# EAGLE board ASDF (EAGLE 9.4.0)
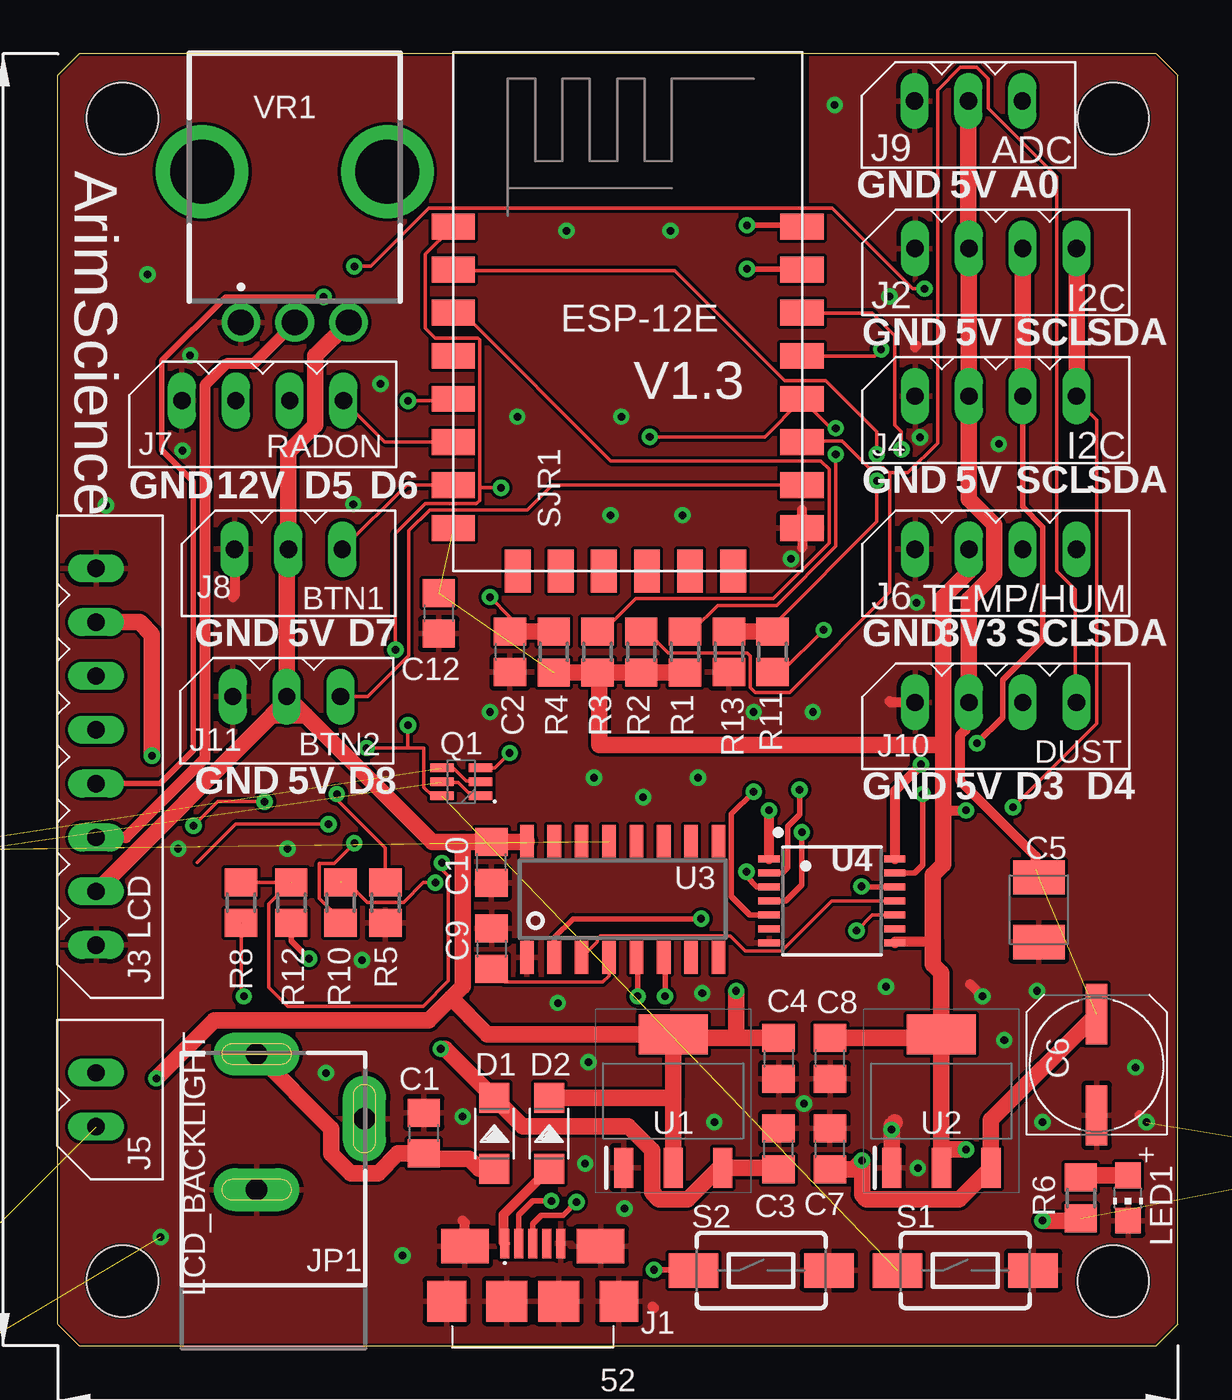
[diagram p0: board, top side]
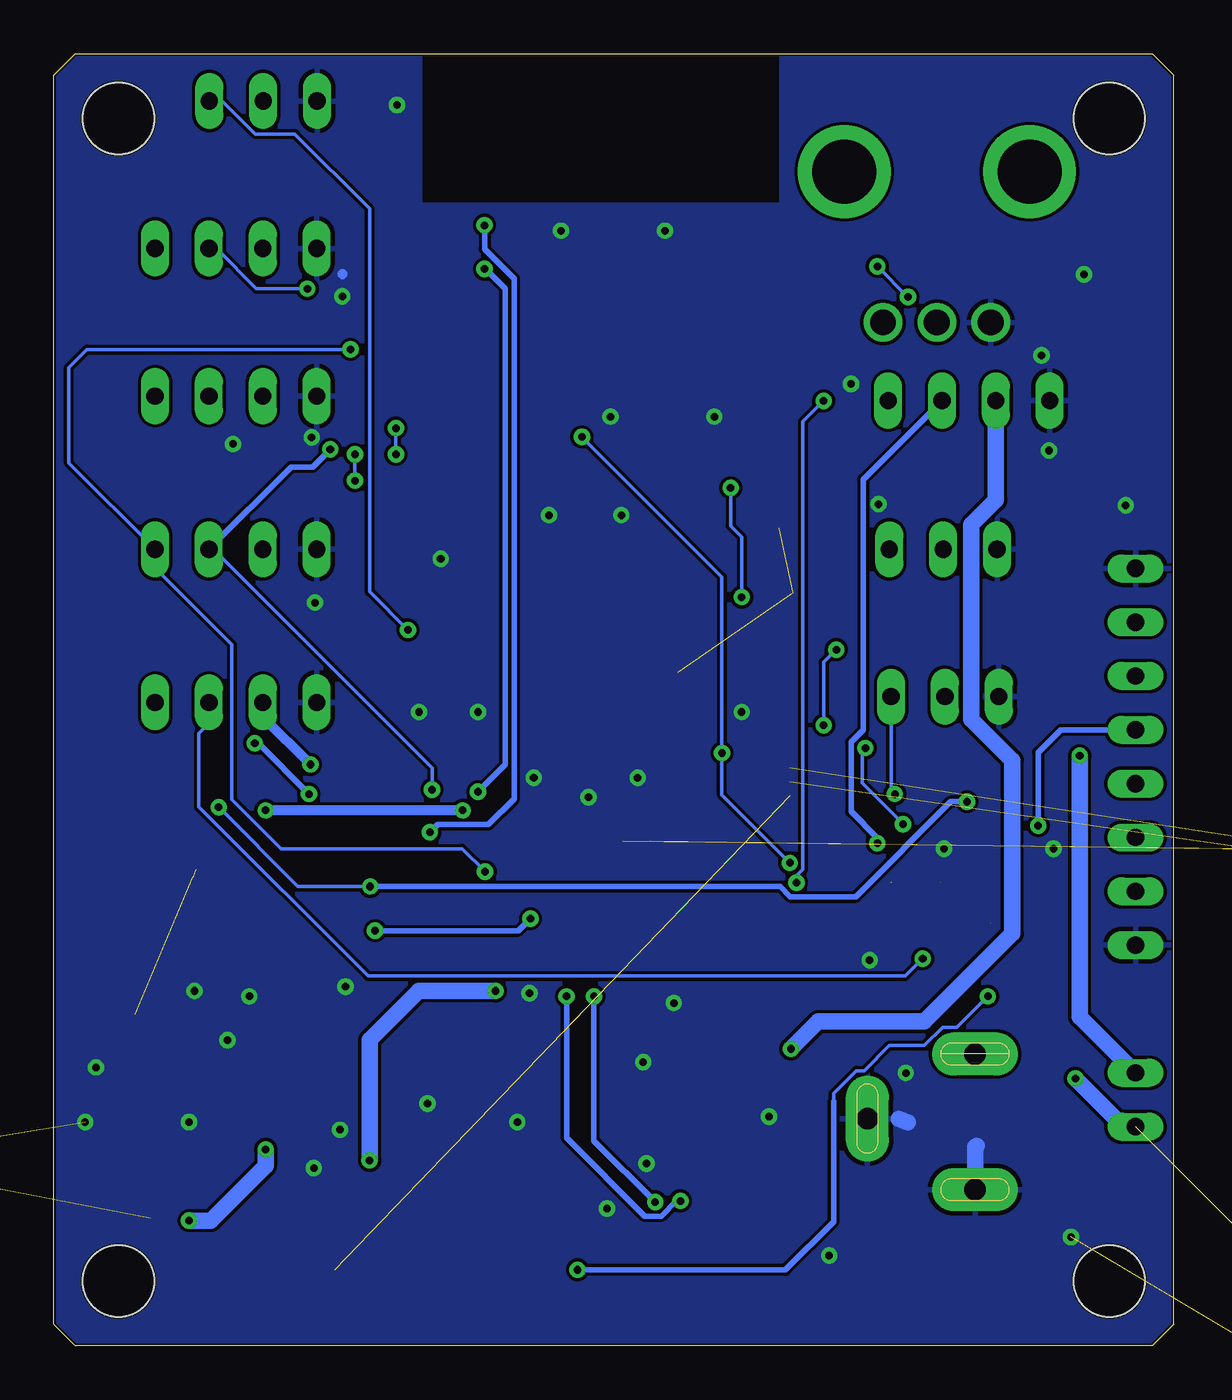
[diagram p1: board, bottom side, seen from below]

Size 52 x 60 mm. Coordinates in mm from the lower left corner, seen from the top.
Outline: 0,1 0,59 1,60 51,60 52,59 52,1 51,0 1,0 0,1
Copper layers (1*16): Top 0.035mm / dielectric 1.5mm / Bottom 0.035mm
Design rules "default *": minimum track width 6mil, minimum drill 0.35mm, track to track 6mil, track to pad 6mil, pad to pad 6mil, via to via 6mil, smd to smd 6mil, copper to edge 4mil, drill to drill 6mil, minimum pad ring 10mil, minimum via ring 8mil, stop-mask expansion 4mil, vias tented up to drill 15mil, thermal gap 8mil
Net classes: 1 power: width 0.457 mm
Holes 3.3 mm at 3,57 49,57 49,3 3,3

## Footprints (pad centres in the part's own frame; a part is rotated, then mirrored left to right if it is on the bottom)
C0805 = smd 1.3 x 1.5: 1 -0.95,0; 2 0.95,0
SMC_B = smd 1.6 x 2.4: + -1.5,0; - 1.5,0
UD-6,3X7,7_NICHICON = smd 2.8 x 1: + 2.35,0; - -2.35,0
SOD-123 = smd 1.397 x 1.397: + -1.651,0; - 1.651,0
ZX62B5PA33 = smd 0.4 x 1.35: D+ 0,1.95; D- -0.65,1.95; GND 1.3,1.95; ID 0.65,1.95; VCC -1.3,1.95 | smd 2.2 x 1.6: SHIELD_1 -3.15,1.825; SHIELD_6 3.15,1.825 | smd 1.8 x 1.9: SHIELD_2 -4,-0.725; SHIELD_5 4,-0.725 | smd 1.9 x 1.9: SHIELD_3 -1.2,-0.725; SHIELD_4 1.2,-0.725
5267-4 = drill 0.8 long: P$1 0,0; P$2 2.5,0; P$3 5,0; P$4 7.5,0
5267-8 = drill 0.8 long: P$1 0,0; P$2 2.5,0; P$3 5,0; P$4 7.5,0; P$5 10,0; P$6 12.5,0; P$7 15,0; P$8 17.5,0
5267-2 = drill 0.8 long: P$1 0,0; P$2 2.5,0
5267-3 = drill 0.8 long: P$1 0,0; P$2 2.5,0; P$3 5,0
POWER_JACK_SLOT = drill 1 pad 2 long: GND@1 2.5,1.39; GND@2 -2.5,-1.91; PWR 2.5,-4.91
CHIP-LED0805 = smd 1.2 x 1.2: A 0,-1.05; C 0,1.05
SOT65P210X100-6N = smd 1.1 x 0.4: 1 -0.9,0.65; 2 -0.9,0; 3 -0.9,-0.65; 4 0.9,-0.65; 5 0.9,0; 6 0.9,0.65
R0805 = smd 1.3 x 1.5: 1 -0.95,0; 2 0.95,0
TACTILE_SWITCH_SMD_6.0X3.5MM = smd 2.3 x 1.6: 1 -3.15,0; 2 3.15,0
ESP8266-ESP12E = smd 2 x 1.2: 1 -7.62,5.84; 2 -7.62,3.84; 3 -7.62,1.84; 4 -7.62,-0.16; 5 -7.62,-2.16; 6 -7.62,-4.16; 7 -7.62,-6.16; 8 -7.62,-8.16; 9 8.58,-8.16; 10 8.58,-6.16; 11 8.58,-4.16; 12 8.58,-2.16; 13 8.58,-0.16; 14 8.58,1.84; 15 8.58,3.84; 16 8.58,5.84 | smd 1.2 x 2: 17 -4.62,-10.16; 18 -2.62,-10.16; 19 -0.62,-10.16; 20 1.38,-10.16; 21 3.38,-10.16; 22 5.38,-10.16
SOT230P700X170-4N = smd 1.85 x 0.9: 1 -3.1,2.3; 2 -3.1,0; 3 -3.1,-2.3 | smd 1.85 x 3.2: 4 3.1,0
SOIC16 = smd 0.635 x 1.524: 1 -4.445,-2.695; 2 -3.175,-2.695; 3 -1.905,-2.695; 4 -0.635,-2.695; 5 0.635,-2.695; 6 1.905,-2.695; 7 3.175,-2.695; 8 4.445,-2.695; 9 4.445,2.695; 10 3.175,2.695; 11 1.905,2.695; 12 0.635,2.695; 13 -0.635,2.695; 14 -1.905,2.695; 15 -3.175,2.695; 16 -4.445,2.695
TSSOP14 = smd 0.305 x 0.991: 1 -1.95,-2.918; 2 -1.3,-2.918; 3 -0.65,-2.918; 4 0,-2.918; 5 0.65,-2.918; 6 1.3,-2.918; 7 1.95,-2.918; 8 1.95,2.918; 9 1.3,2.918; 10 0.65,2.918; 11 0,2.918; 12 -0.65,2.918; 13 -1.3,2.918; 14 -1.95,2.918
RK09K1130BGM = drill 1.2 pad 1.8: 1 -2.5,-12.5; 2 0,-12.5; 3 2.5,-12.5 | drill 2.97 pad 4.3: 4 4.3,-5.5; 5 -4.3,-5.5

## Placement (x,y rotation side)
C1  10uF  [C0805]  16.99,9.87 270 top
C2  100nF  [C0805]  20.99,32.23 90 top
C3  10uF  [C0805]  33.46,9.14 90 top
C4  22uF  [C0805]  33.47,13.35 270 top
C5  100uF  [SMC_B]  45.55,20.25 270 top
C6  220uF  [UD-6,3X7,7_NICHICON]  48.23,13.05 90 top
C7  10uF  [C0805]  35.85,9.14 90 top
C8  22uF  [C0805]  35.86,13.35 90 top
C9  100nF  [C0805]  20.14,18.44 270 top
C10  100nF  [C0805]  20.13,22.45 90 top
C11  100uF  [SMC_B]  75.63,17.43 270 top  (outside the outline)
C12  100nF  [C0805]  17.69,34.02 90 top
C13  220uF  [UD-6,3X7,7_NICHICON]  74.52,8.76 90 top  (outside the outline)
C14  100nF  [C0805]  -19.05,-9.68 0 top  (outside the outline)
D1  1N5819W  [SOD-123]  20.27,9.86 90 top
D2  1N5819W  [SOD-123]  22.81,9.86 90 top
J1  ZX62-B-5PA(33)  [ZX62B5PA33]  22.05,2.79 0 top
J2  I2C  [5267-4]  39.8,50.96 0 top
J3  LCD  [5267-8]  1.78,18.6 90 top
J4  I2C  [5267-4]  39.8,44.1 0 top
J5  LCD_BACKLIGHT  [5267-2]  1.78,10.17 90 top
J6  TEMP/HUM  [5267-4]  39.8,36.99 0 top
J7  RADON  [5267-4]  5.76,43.9 0 top
J8  BTN1  [5267-3]  8.21,36.99 0 top
J9  ADC  [5267-3]  39.78,57.81 0 top
J10  DUST  [5267-4]  39.8,29.88 0 top
J11  BTN2  [5267-3]  8.13,30.15 0 top
JP1  POWER_JACKSLT  [POWER_JACK_SLOT]  11.73,8.64 180 top
LED1  green  [CHIP-LED0805]  49.69,6.86 180 top
Q1  UMH3N  [SOT65P210X100-6N]  18.73,26.19 180 top
R1  10k  [R0805]  29.12,32.23 90 top
R2  10k  [R0805]  27.09,32.23 90 top
R3  10k  [R0805]  25.06,32.23 90 top
R4  10k  [R0805]  23.02,32.23 90 top
R5  10k  [R0805]  15.21,20.57 90 top
R6  10k  [R0805]  47.5,6.86 90 top
R8  470Ω  [R0805]  8.51,20.57 270 top
R9  10k  [R0805]  -20.27,21.91 90 top  (outside the outline)
R10  470Ω  [R0805]  13.13,20.57 270 top
R11  47k(1%)  [R0805]  33.19,32.23 270 top
R12  470Ω  [R0805]  10.84,20.57 270 top
R13  10k(1%)  [R0805]  31.16,32.23 90 top
R14  10k  [R0805]  -18.19,21.91 90 top  (outside the outline)
S1  RST  [TACTILE_SWITCH_SMD_6.0X3.5MM]  42.13,3.49 0 top
S2  FLASH  [TACTILE_SWITCH_SMD_6.0X3.5MM]  32.65,3.49 0 top
SJR1  ESP-12E  [ESP8266-ESP12E]  25.97,46.13 0 top
U1  5V_REG  [SOT230P700X170-4N]  28.57,11.37 90 top
U2  3V3_REG  [SOT230P700X170-4N]  41.02,11.37 90 top
U3  CH340C  [SOIC16]  26.23,20.73 0 top
U4  TXB0104  [TSSOP14]  35.94,20.66 270 top
VR1  RK09K1130AAU  [RK09K1130BGM]  11,60.02 0 top

## Library data of the parts
C1-C14 = rcl; SPICEPREFIX: C
D1 D2 = Seeed-Diode; MPN: SS0520-7-F
J1 = SamacSys_Parts; DESCRIPTION: USB Connectors MICRO B RECEPT RA SMT BTTM MNT; HEIGHT: 2.8mm; MANUFACTURER_NAME: Hirose; MANUFACTURER_PART_NUMBER: ZX62-B-5PA(33); MOUSER_PART_NUMBER: 798-ZX62-B-5PA33; MOUSER_PRICE-STOCK: https://www.mouser.com/Search/Refine.aspx?Keyword=798-ZX62-B-5PA33
J2-J11 = con-molex-spox
JP1 = kanflo
LED1 = adafruit
Q1 = SamacSys_Parts; DESCRIPTION: ROHM - UMH3NFHATN - TRANS, NPN, AUTO, 4.7K/4.7K, SOT-353; HEIGHT: 1mm; MANUFACTURER_NAME: ROHM Semiconductor; MANUFACTURER_PART_NUMBER: UMH3NFHATN; MOUSER_PART_NUMBER: 755-UMH3NFHATN; MOUSER_PRICE-STOCK: https://www.mouser.com/Search/Refine.aspx?Keyword=755-UMH3NFHATN
R1-R6 R8-R14 = rcl; SPICEPREFIX: R
S1 S2 = SparkFun-Switches; PROD_ID: SWCH-00815; SF_SKU: COM-08229
SJR1 = esp12e
U1 U2 = SamacSys_Parts; DESCRIPTION: 1A 5V LDO Linear Voltage Reg SOT-223 Diodes Inc AZ1117H-5.0TRE1, Single Linear Voltage Regulator, 1A 4.9 5.1 V, 1%, 3-Pin SOT-223; HEIGHT: 1.7mm; MANUFACTURER_NAME: Diodes Inc.; MANUFACTURER_PART_NUMBER: AZ1117H-5.0TRE1; MOUSER_PART_NUMBER: 621-AZ1117H-5.0TRE1; MOUSER_PRICE-STOCK: https://www.mouser.com/Search/Refine.aspx?Keyword=621-AZ1117H-5.0TRE1
U3 = ch340g
U4 = SparkFun-IC-Comms; PROD_ID: NA-XXXXX
VR1 = SamacSys_Parts; DESCRIPTION: Audio single pot. 10K Vertical 15mm,1B Alps RK09K Series, Linear Potentiometer with a 6 mm Dia. Shaft, 10k, +/-20%, Through Hole; HEIGHT: mm; MANUFACTURER_NAME: ALPS; MANUFACTURER_PART_NUMBER: RK09K1130A6S; MOUSER_PART_NUMBER: 688-RK09K1130A6S; MOUSER_PRICE-STOCK: https://www.mouser.com/Search/Refine.aspx?Keyword=688-RK09K1130A6S

## Nets
3.3V [power]: C8.2 C11.+ C12.2 C13.+ J6.P$2 R1.1 R2.1 R3.1 R4.1 R6.1 SJR1.8 U2.2 U2.4 U4.1 U4.8
5V [power]: C4.1 C5.+ C6.+ C7.1 C10.2 C14.2 D2.- J2.P$2 J3.P$2 J4.P$2 J5.P$1 J8.P$2 J9.P$2 J10.P$2 J11.P$2 U1.2 U1.4 U2.3 U3.16 U4.14 VR1.3
5V_INPUT [power]: D2.+ J1.VCC
12V [power]: C3.1 D1.- J7.P$2 U1.3
ADC: R11.1 R13.2 SJR1.2
CS0_ESP: SJR1.17
D+_USB: J1.D+ U3.5
D-_USB: J1.D- U3.6
DTR: Q1.2 Q1.4 R9.1
EN: R3.2 SJR1.3
GND [power]: C1.1 C2.1 C3.2 C4.2 C5.- C6.- C7.2 C8.1 C9.1 C10.1 C11.- C12.1 C13.- C14.1 J1.GND J1.SHIELD_1 J1.SHIELD_2 J1.SHIELD_3 J1.SHIELD_4 J1.SHIELD_5 J1.SHIELD_6 J2.P$1 J3.P$1 J3.P$8 J4.P$1 J6.P$1 J7.P$1 J8.P$1 J9.P$1 J10.P$1 J11.P$1 JP1.GND@1 JP1.GND@2 LED1.C R5.1 R13.1 S1.2 S2.2 SJR1.9 U1.1 U2.1 U3.1 U4.7 VR1.1
GPIO0: Q1.3 R1.2 R8.1 R12.1 SJR1.12
GPIO2: J10.P$4 R2.2 SJR1.11
GPIO4: J6.P$4 SJR1.13 U4.3
GPIO5: J6.P$3 SJR1.14 U4.2
GPIO9: SJR1.19
GPIO10: SJR1.20
GPIO12: J7.P$4 SJR1.6
GPIO13: J8.P$3 SJR1.7
GPIO14: R10.1 SJR1.5
GPIO15: J11.P$3 R5.2 SJR1.10
GPIO16: SJR1.4
LED+: J3.P$7 J5.P$2
MISO_ESP: SJR1.18
MOSI_ESP: SJR1.21
N$1: C9.2 U3.4
N$2: J3.P$3 VR1.2
N$3: C1.2 D1.+ JP1.PWR
N$4: LED1.A R6.2
N$5: J9.P$3 R11.2
N$6: J7.P$3 R10.2
N$7: R9.2 U3.13
N$8: R14.2 U3.14
N$9: J10.P$3 R12.2
POWER1: R8.2 S2.1
RST: C2.2 Q1.6 R4.2 S1.1 SJR1.1
RTS: Q1.1 Q1.5 R14.1
RXD: SJR1.15 U4.5
RXD_5V: U3.2 U4.10
SCL_5V: J2.P$3 J3.P$4 J4.P$3 U4.13
SCLK_ESP: SJR1.22
SDA_5V: J2.P$4 J3.P$5 J4.P$4 U4.12
TXD: SJR1.16 U4.4
TXD_5V: U3.3 U4.11

## Tracks (layer width: path | path; a pad name or v marks a point on that pad's centre or on a via)
3.3V  (via drill 0.35)  (4 unrouted)
  Top 0.457: U4.1 v33.02,24.86 | 41.11,24.86 v42.16,24.86 | 40.62,18.76 38.86,18.76 U4.8
  Top 0.762: C8.2 40.85,14.3 U2.4 | U2.4 41.02,9.11 | 41.02,9.11 U2.2 | R3.1 R2.1 R1.1 | U2.4 41.02,17.31 40.62,17.7 40.62,18.76 40.62,21.87 41.11,22.36 41.11,24.86 41.11,27.91 | J6.P$2 42.3,35.95 41.11,34.76 41.11,27.91 | R4.1 R3.1 | R3.1 25.15,31.19 25.15,27.91 41.11,27.91 | v45.72,5.81 47.4,5.81 R6.1 | v42.16,9.11 41.02,9.11
  Bottom 0.457: v33.02,24.86 v42.16,24.86
  Bottom 0.762: v42.16,9.11 42.16,8.35 44.7,5.81 v45.72,5.81
5V  (via drill 0.35)  (3 unrouted)
  Top 0.457: v40.08,26.99 38.86,25.77 38.86,22.65 U4.14 | 45.41,22.12 45.41,22.73 41.91,26.23 41.91,28.36 42.14,28.59 42.14,29.51 J10.P$2
  Top 0.762: J10.P$2 42.3,34.66 43.49,35.84 43.49,38.14 42.3,39.32 J4.P$2 J2.P$2 42.28,50.98 J9.P$2 | J11.P$2 10.63,36.91 J8.P$2 10.71,41.51 11.95,42.75 11.95,45.98 VR1.3 | C4.1 31.24,14.3 | 31.24,14.3 28.74,14.3 U1.4 | U1.4 28.57,11.51 | D2.- 28.57,11.51 | J3.P$2 9.94,29.26 | 9.94,29.26 10.63,29.95 J11.P$2 | U3.16 21.75,23.4 C10.2 18.8,23.4 | J11.P$2 11.51,29.26 | 11.51,29.26 17.38,23.4 18.8,23.4 | 11.51,29.26 9.94,29.26 | v31.5,16.48 31.5,14.55 31.24,14.3 | 18.8,23.4 18.8,16.68 18.27,16.14 | v4.57,12.41 7.26,15.11 17.23,15.11 18.27,16.14 | 18.27,16.14 19.94,14.47 U1.4 | U1.2 28.57,11.51 | C7.1 36.93,8.19 v37.34,8.6 37.34,7.01 37.54,6.81 41.86,6.81 U2.3 43.32,10.49 C6.+
  Bottom 0.457: v40.08,26.99 42.29,29.2 42.29,29.81 J10.P$2
  Bottom 0.762: v31.5,16.48 35.05,16.48 37.34,14.19 v37.34,8.6 | v4.57,12.41 2.33,10.17 J5.P$1
5V_INPUT
  Top 0.457: J1.VCC 20.7,4.79 20.7,6.1 D2.+
12V  (via drill 0.35)
  Top 0.762: C3.1 33.39,8.27 U1.3 30.7,8.27 29.25,6.81 27.9,6.81 27.59,7.12 27.59,9.08 26.49,10.18 21.59,10.18 D1.- 17.99,13.79 v17.78,13.79
  Bottom 0.762: v17.78,13.79 16.51,15.06 11.58,15.06 7.5,19.14 7.5,27.19 9.39,29.08 9.39,38.14 8.26,39.27 J7.P$2
ADC  (via drill 0.35)
  Top 0.152: v38.02,41.4 38.02,42.46 35.66,44.82 33.76,44.82 28.65,49.93 18.36,49.93 SJR1.2 | v38.02,40.18 38.02,38.27 33.3,33.55 R11.1
  Top 0.762: R11.1 R13.2
  Bottom 0.152: v38.02,40.18 v38.02,41.4
D+_USB  (via drill 0.35)
  Top 0.254: v26.92,16.22 26.92,17.98 U3.5 | v24.08,6.67 23.47,6.06 22.45,6.06 22.05,5.67 J1.D+
  Bottom 0.254: v24.08,6.67 26.92,9.52 v26.92,16.22
D-_USB  (via drill 0.35)
  Top 0.254: v28.19,16.22 28.19,17.98 U3.6 | v22.91,6.72 22.05,6.72 21.4,6.08 J1.D-
  Bottom 0.254: v28.19,16.22 28.19,9.66 24.55,6.02 23.81,6.02 23.1,6.72 v22.91,6.72
DTR  (1 unrouted)
  Top 0.152: Q1.4 17.91,26.84 18.36,26.84 18.97,26.23 19.58,26.23 Q1.2 19.66,26.16
EN
  Top 0.152: R3.2 25.07,33.24 25.38,33.24 26.82,34.69 33.22,34.69 35.81,37.28 35.81,40.71 35.43,41.09 25.68,41.09 18.82,47.95 18.36,47.95 SJR1.3
GND  (via drill 0.35)  (3 unrouted)
  Top 0.457: 45.55,16.56 v45.47,16.48 | 42.36,16.79 v42.93,16.22 | 50.23,10.7 v50.55,10.38 | 35.85,12.39 C8.1 | C3.2 | J10.P$1 38.67,29.88 38.61,29.94 | J1.SHIELD_2 17.98,2 | 27.62,1.81 27.69,1.75 | J1.SHIELD_1 18.9,5.7 18.8,5.81 | 39.8,46.37 39.88,46.45 | J8.P$1 8.21,34.85 8.13,34.77 | 34.55,38.83 SJR1.9 34.55,37.05
  Top 0.762: C12.1 17.7,33.05 | U2.1 38.72,10.24 38.86,10.38
  Bottom 0.457: 38.61,49.77 38.61,49.75
  Bottom 0.762: JP1.GND@1 9.23,9.23 9.14,9.28 | 12.77,10.55 12.36,10.38
  other vias: 16,4.18 23.62,51.78 28.45,51.78 21.34,43.15 26.16,43.15 27.18,25.47 29.92,16.38 5.59,23.08 10.67,23.08 4.78,5.05 14.99,44.67 13.72,39.08 45.72,10.38 24.64,13.18 30.48,10.38 26.31,6.37 34.04,36.54 39.88,34.51 5.79,41.57 32.31,29.43 35.05,29.43 20.07,29.43 24.89,26.38 29.72,26.38 18.8,10.64 14.12,17.9 2.24,39.03 4.17,49.75 36.07,57.63 43.69,41.88 50.04,12.92 43.94,14.19 38.71,10.03 39.93,8.25 29.01,38.58 25.65,38.58 12.45,12.67 38.61,48.74 40.03,42.18 6.15,45.99 23.22,15.92 24.49,8.45 34.65,11.25 38.46,16.68
  pour Top: -6.89,65.66 -6.89,-6.35 70.47,-6.35 70.47,65.66
  pour Bottom: -8.89,65.66 -8.89,-4.35 71.47,-4.35 71.47,65.66
GPIO0  (via drill 0.35)  (1 unrouted)
  Top 0.152: v20.98,27.53 20.3,26.84 19.66,26.84 Q1.3 | v17.83,22.42 17.83,22.12 18.14,21.81 18.14,16.94 16.97,15.77 10.67,15.77 9.8,16.63 9.8,20.52 10.79,21.51 R12.1 | v36.12,41.4 36.12,37.13 33.38,34.38 30.63,34.38 29.49,33.24 29.18,33.24 R1.2 | v36.12,42.62 35.89,42.62 34.59,43.91 SJR1.12 34.52,43.91 32.82,42.21 v27.48,42.21 | R12.1 R8.1
  Bottom 0.152: v17.83,22.42 20.98,25.57 v20.98,27.53 20.98,35.71 v27.48,42.21 | v36.12,42.62 v36.12,41.4
GPIO2
  Top 0.152: 38.59,40.52 38.33,40.79 37.64,40.79 36.42,42.01 34.59,42.01 SJR1.11 | 38.59,40.52 38.63,40.48 38.63,34.99 33.98,30.35 32.38,30.35 32.16,30.57 32.16,32.02 32,32.17 28.35,32.17 27.36,33.17 27.13,33.17 R2.2 | J10.P$4 47.24,29.89 47.24,35.12 46.38,35.98 46.38,54.3 43.2,57.47 43.2,58.84 42.67,59.38 41.91,59.38 40.84,58.31 40.84,47.57 40.84,41.93 39.47,40.56 38.63,40.56 38.59,40.52
GPIO4  (via drill 0.35)
  Top 0.152: v38.23,46.27 37.92,45.97 34.59,45.97 SJR1.13
  Top 0.254: U4.3 32.46,21.3 31.98,21.79 v31.98,22.02
  Bottom 0.152: v31.98,22.02 33.05,23.08 41.45,23.08 43.74,25.37 43.74,32.56 47.24,36.06 47.24,36.98 J6.P$4 51.31,41 51.31,45.43 50.47,46.27 v38.23,46.27
GPIO5  (via drill 0.35)
  Top 0.152: v39.17,41.62 39.17,42.46 38.86,42.77 38.86,46.91 37.82,47.95 34.59,47.95 SJR1.14
  Top 0.254: v34.44,25.82 34.44,24.67 33.89,24.12 33.89,22.21 33.63,21.95 U4.2
  Bottom 0.152: J6.P$3 44.59,36.99 34.44,26.84 v34.44,25.82
  Bottom 0.254: v39.17,41.62 39.98,40.81 40.98,40.81 J6.P$3
GPIO12
  Top 0.152: J7.P$4 15.19,41.97 SJR1.6
GPIO13
  Top 0.152: J8.P$3 16.19,39.97 SJR1.7
GPIO14  (via drill 0.35)  (1 unrouted)
  Top 0.152: v17.53,21.51 16.97,21.51 16.05,20.59 14.38,20.59 13.46,21.51 13.16,21.51 R10.1 | v16.26,43.88 18.26,43.88 SJR1.5
  Bottom 0.152: v17.53,21.51 17.53,21.81 17.22,22.12 17.22,42.92 v16.26,43.88
GPIO15  (via drill 0.35)
  Top 0.152: SJR1.10 22.96,39.97 21.79,38.8 17.26,38.8 16.3,37.85 16.3,32.05 14.4,30.15 J11.P$3 | v12.95,25.62 12.95,25.37 15.21,23.11 R5.2
  Bottom 0.152: v12.95,25.62 13.13,25.8 J11.P$3
LED+  (via drill 0.35)
  Top 0.762: v4.37,27.4 4.37,33.04 3.81,33.6 J3.P$7
  Bottom 0.762: J5.P$2 4.37,15.27 v4.37,27.4
N$1
  Top 0.152: C9.2 20.74,16.88 25.3,16.88 25.59,17.18 U3.4
N$2
  Top 0.508: VR1.2 9.09,45.61 7.83,45.61 6.82,44.61 6.82,27.26 3.16,23.6 J3.P$3
N$3
  Top 0.762: D1.+ 19.56,8.2 19.09,8.67 17.24,8.67 C1.2 15.78,8.92 14.87,8.01 13.6,8.01 12.7,8.91 12.7,10.08 JP1.PWR
N$4
  Top 0.762: R6.2 47.6,7.91 LED1.A
N$5  (via drill 0.35)
  Top 0.152: R11.2 33.6,31.28 v35.56,33.24
  Bottom 0.152: v35.56,33.24 37.34,35.02 37.34,52.8 40.81,56.27 42.65,56.27 44.18,57.81 J9.P$3
N$6  (via drill 0.35)
  Top 0.152: R10.2 13.13,19.8 12.15,20.78 12.15,22.4 12.83,22.4 v13.77,23.34
  Bottom 0.254: J7.P$3 14.43,40.23 14.43,28.58 14.98,28.03 14.98,24.81 13.77,23.59 v13.77,23.34
N$7  (1 unrouted)
N$8  (1 unrouted)
N$9  (via drill 0.35)
  Top 0.254: v11.66,17.98 10.84,18.79 R12.2
  Bottom 0.152: v11.66,17.98 12.47,17.16 37.41,17.16 45.26,25.01 45.26,28.44 44.81,28.9 44.81,29.81 J10.P$3
POWER1  (via drill 0.35)  (1 unrouted)
  Top 0.152: v8.64,16.22 8.51,16.35 R8.2
  Top 0.254: v27.69,3.52 29.47,3.52 S2.1
  Bottom 0.152: 15.8,11.35 15.8,11.72 14.74,12.78 14.37,12.78 13.21,13.94 11.58,13.94 10.74,14.78 10.09,14.78 v8.64,16.22
  Bottom 0.254: 15.8,11.35 15.8,5.76 18.03,3.52 v27.69,3.52
RST  (via drill 0.35)  (1 unrouted)
  Top 0.152: Q1.6 17.37,25.55 16.99,25.93 16.99,27.76 16.26,27.76 | v12.57,24.23 8.26,24.23 6.48,22.45 | 16.26,27.76 v14.33,27.76 | 19.58,39.85 19.58,39.26 19.43,39.11 17.07,39.11 15.67,37.71 v15.67,32.33 | 19.58,39.85 19.58,46.73 19.51,46.81 17.53,46.81 17.07,47.26 17.07,50.69 18.29,51.91 SJR1.1 | v16.26,28.82 16.26,27.76 | v20.07,34.77 20.99,33.84 C2.2 | 19.58,39.85 v20.57,39.85
  Top 0.762: R4.2 C2.2
  Bottom 0.152: v12.57,24.23 14.48,26.13 14.48,27.6 v14.33,27.76 | v15.67,32.33 16.26,31.74 v16.26,28.82 | v20.57,39.85 20.57,38.07 20.07,37.56 v20.07,34.77
RTS  (1 unrouted)
  Top 0.152: Q1.5 17.91,26.16 18.59,26.16 19.2,25.55 19.58,25.55 Q1.1 19.66,25.47
RXD  (via drill 0.35)
  Top 0.254: U4.5 32.13,20 31.27,20.87 31.27,24.68 v32.31,25.72 | v32,50.01 34.52,50.01 SJR1.15
  Bottom 0.152: 31.95,50.01 v32,50.01
  Bottom 0.254: v32.31,25.72 31.04,26.99 31.04,49.09 31.95,50.01
RXD_5V  (via drill 0.35)
  Top 0.152: v37.08,19.27 37.82,20 U4.10
  Top 0.254: U3.2 23.05,18.95 23.93,19.83 v29.87,19.83
  Bottom 0.254: v37.08,19.27 30.43,19.27 v29.87,19.83
SCL_5V  (via drill 0.35)
  Top 0.152: 2.03,26.1 J3.P$4 | v13.77,50.13 14.53,50.13 17.22,52.83 35.97,52.83 39.7,49.09 v40.23,49.09
  Top 0.254: v42.67,27.98 43.87,29.18 43.87,30.92 45.73,32.78 45.73,38.03 44.8,38.96 J4.P$3 | 2.03,26.1 4.75,26.1 6.29,27.65 6.29,40.14 4.83,41.6 4.83,45.74 7.8,48.71 v12.34,48.71 | U4.13 39.78,21.95 40.16,22.34 v40.16,25.62
  Top 0.762: J2.P$3 J4.P$3
  Bottom 0.152: v13.77,50.13 v12.34,48.71 | v40.23,49.09 42.6,49.09 44.42,50.92 44.73,50.92 J2.P$3
  Bottom 0.254: v40.16,25.62 42.52,27.98 v42.67,27.98
SDA_5V  (via drill 0.35)
  Top 0.152: v44.35,25.01 48.23,28.9 48.23,43 47.47,43.76 J4.P$4 | v6.3,24.15 7.42,25.27 v9.6,25.27
  Top 0.254: U4.12 37.34,21.3 v37.31,21.33
  Top 0.762: J4.P$4 J2.P$4
  Bottom 0.152: v44.35,25.01 40.66,21.33 v37.31,21.33
  Bottom 0.254: v37.31,21.33 18.28,21.33 17.8,20.85 14.76,20.85 10.35,25.27 v9.6,25.27 | J3.P$5 5.25,28.6 6.3,27.55 v6.3,24.15
TXD  (via drill 0.35)
  Top 0.254: v34.54,23.84 34.54,21.41 33.79,20.66 U4.4 | v32,52.04 34.49,52.04 SJR1.16
  Bottom 0.254: v32,52.04 32,50.94 30.63,49.56 30.63,25.4 31.83,24.2 34.19,24.2 v34.54,23.84
TXD_5V
  Top 0.152: U3.3 25.05,18.76 25.05,18.9 25.18,19.03 31.22,19.03 31.93,18.32 33.61,18.32 35.94,20.66 U4.11

## Text on the board
tPlace: ArimScience | GND | 5V | A0 | GND | 5V | SCL | SDA | V1.3 | GND | 5V | SCL | SDA | GND | 12V | D5 | D6 | GND | 5V | D7 | GND | 3V3 | SCL | SDA | GND | 5V | D8 | GND | 5V | D3 | D4